# Altium PCB controller.PcbDoc
Units mil, origin at the board's own origin, x right, y up, seen from the top; angles counter-clockwise.
Board outline 6000 x 4000 mil, 2 copper layers (Top Layer, Bottom Layer); 7 components, 12 nets, 60 pads, 0 vias.
Unrouted connection lines stored in the file: 26.
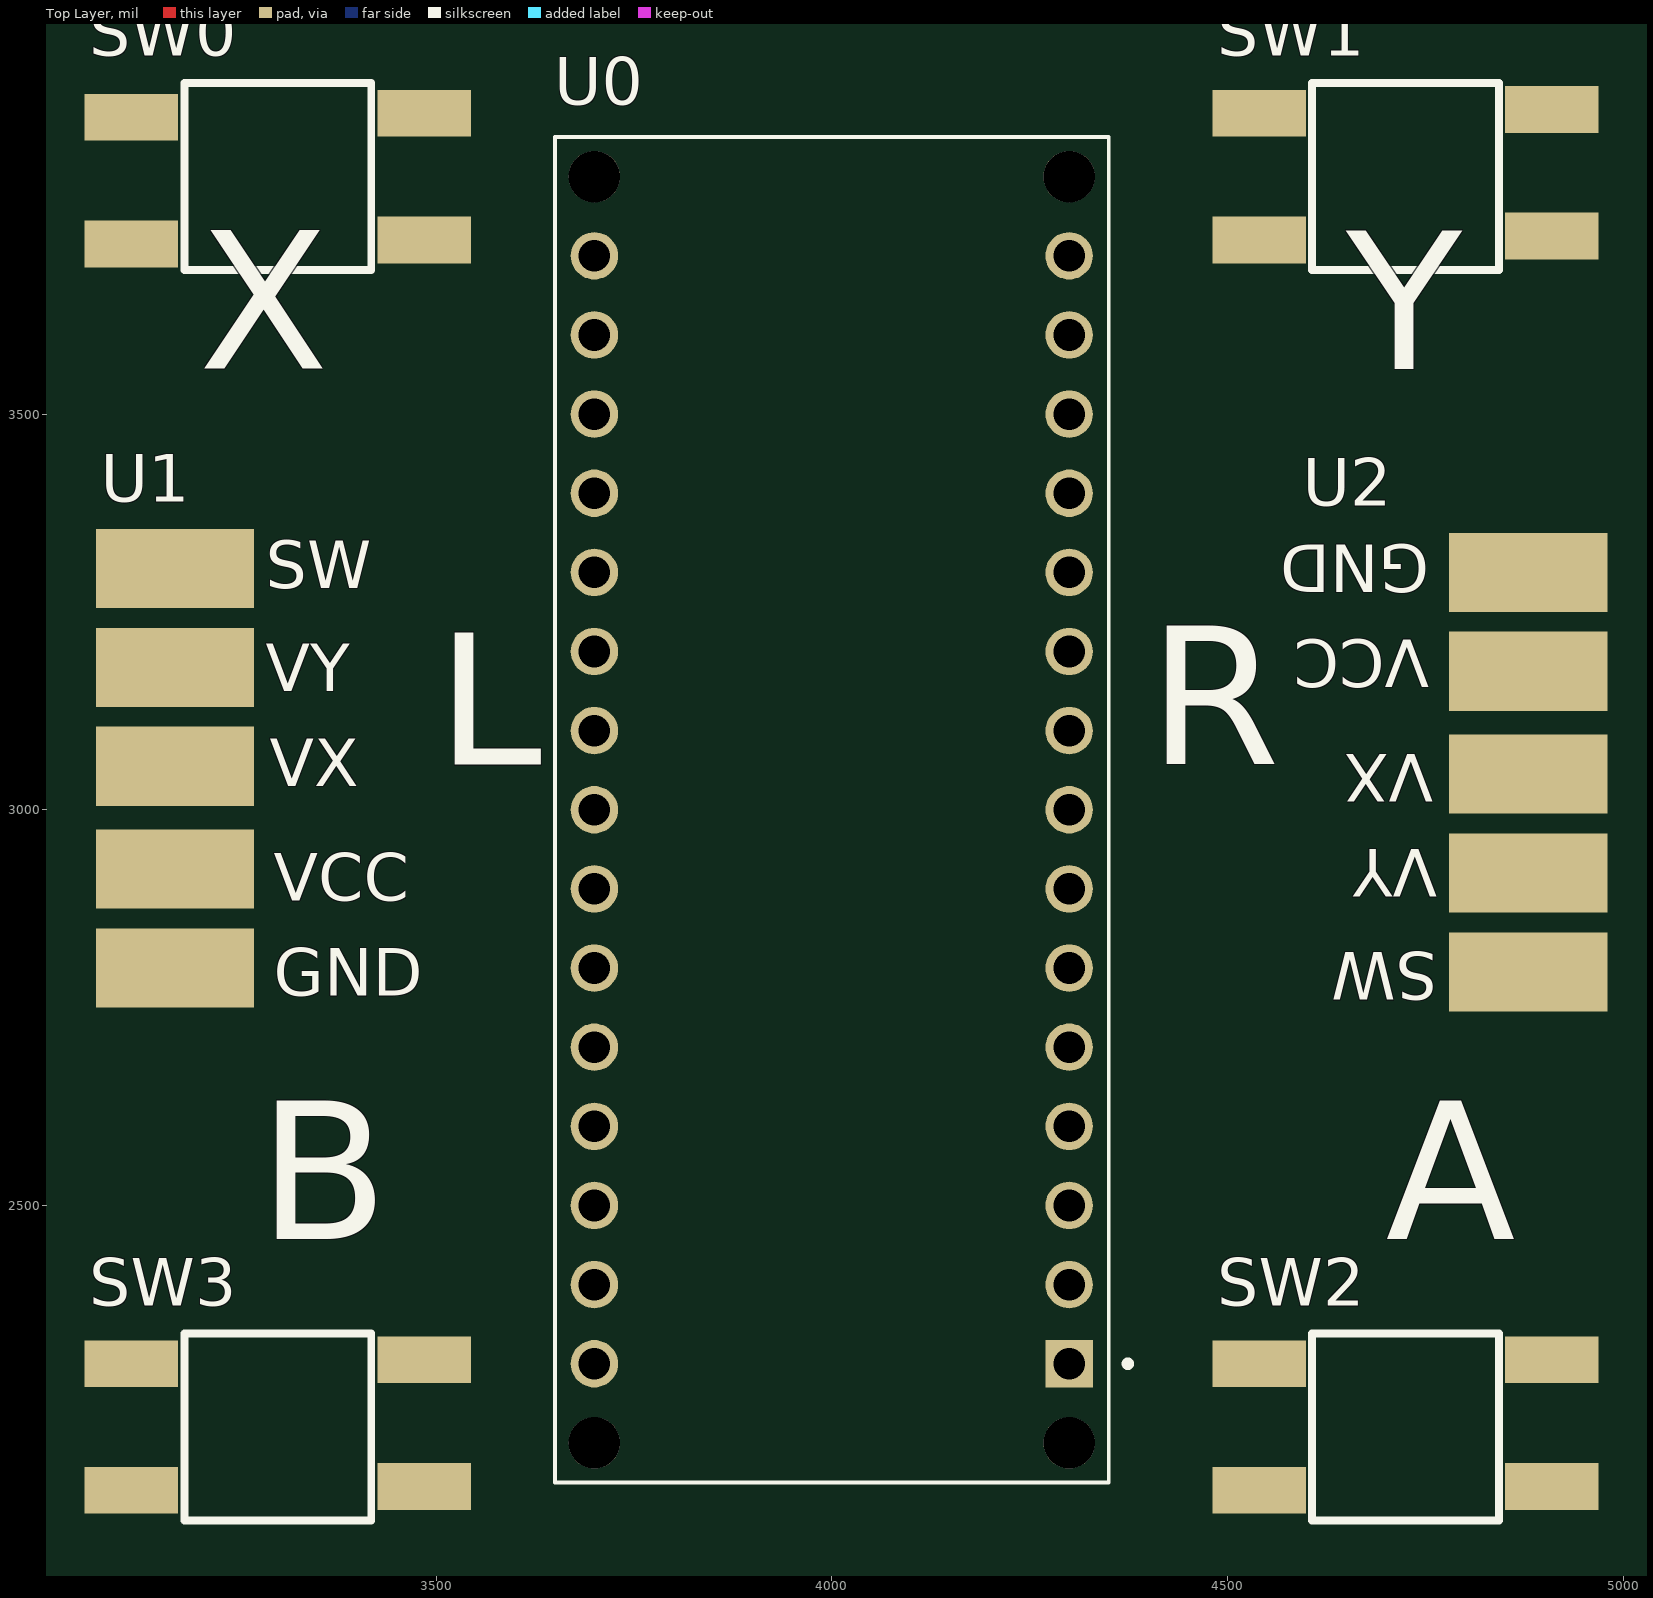
[diagram p0: Top Layer view]
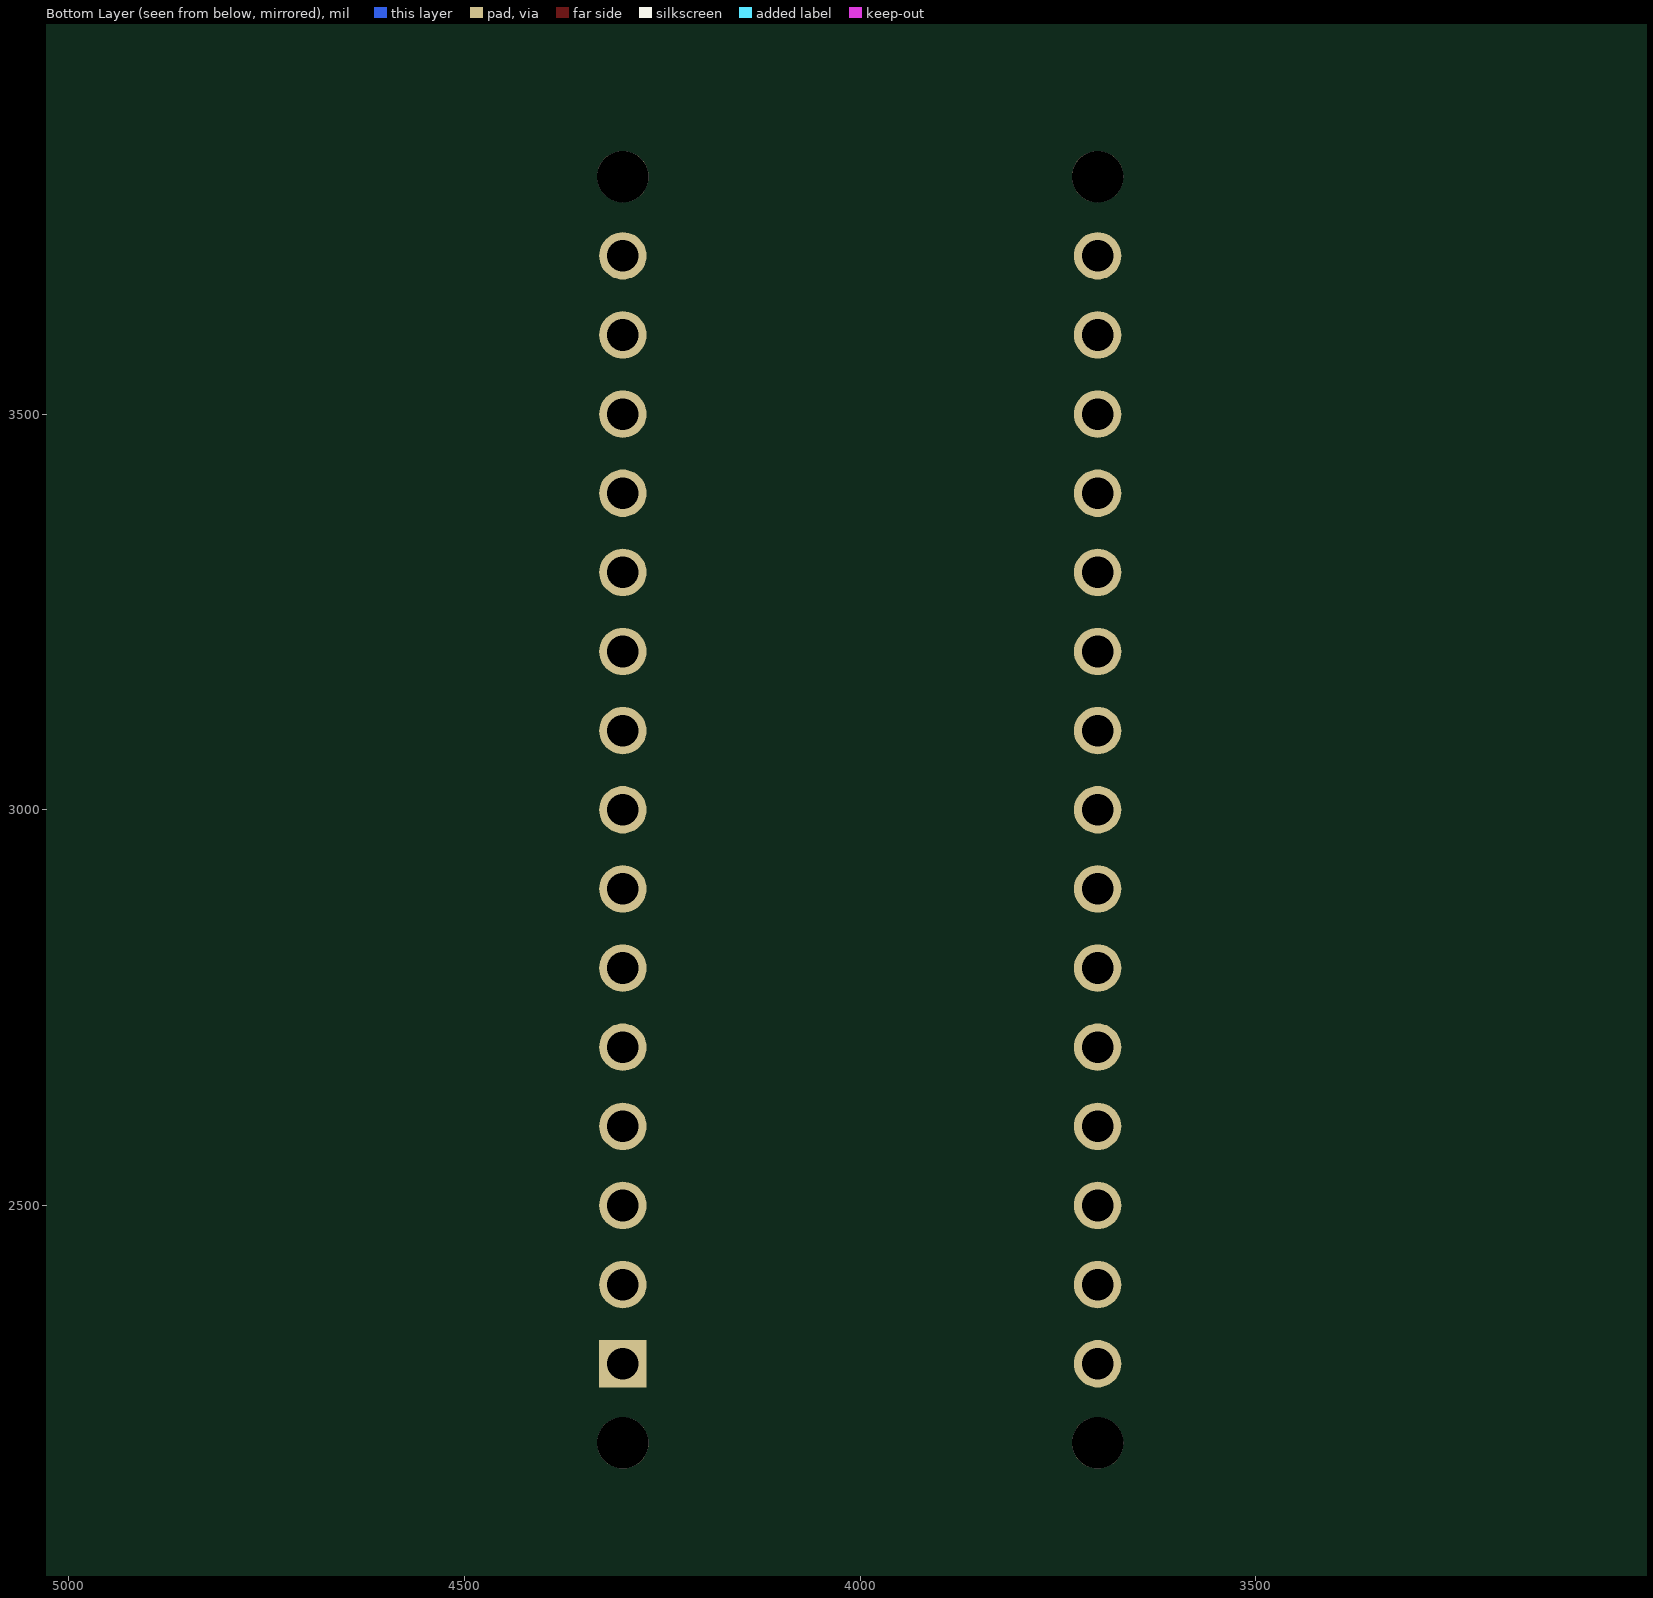
[diagram p1: Bottom Layer view, seen from below]

## Layer stack, top to bottom
Top Solder: solder mask 0.4, Solder Resist, Dk 3.5
Top Layer: signal copper 1.4
Dielectric 1: dielectric 12.6, FR-4, Dk 4.8
Bottom Layer: signal copper 1.4
Bottom Solder: solder mask 0.4, Solder Resist, Dk 3.5

## Board outline
1000,1000 7000,1000 7000,5000 1000,5000

## Design rules (kind name [scope] priority, off if disabled: settings)
Clearance [All] p1: gap=10 ignorepadtopadclearanceinfootprint=FALSE
PolygonConnect [All] p1: connectstyle=Relief reliefconductorwidth=10 reliefentries=4 polygonreliefangle="90 Angle" airgapwidth=10
RoutingVias [All] p1: holewidth=28 width=50 viastyle="Through Hole" minholewidth=28 minwidth=50 maxholewidth=28 maxwidth=50
SolderMaskExpansion [All] p1: expansion=4 istentingtop=FALSE
Width [All] p1: maxlimit=10 minlimit=10 preferedwidth=10
30 further rules are at their usual default settings.

## Components (designator, comment, footprint, x,y, rotation, side; value= is the part's Value field where it differs from the comment)
SW0 "" "temp switch" 3300,3800 r270 top
SW1 "" "temp switch" 4725,3800 r90 top
SW2 "" "temp switch" 4725,2220 r90 top
SW3 "" "temp switch" 3300,2220 r90 top
U0 "ABX00028" MODULE_ABX00028 4000,3000 r90 top
U1 "joystick" joystick#1 2400,3100 r90 top
U2 "joystick" joystick#2 5650,3000 r270 top

## Footprints (in the part's own frame and the unit in brackets; to place one, negate y for a bottom-side part, rotate by r counter-clockwise, add the part's x,y. Pads: shape width x height; smd on the part's side, far side on the other; paste and mask are expansions set on the pad)
joystick#1 [mil]
  rect 100x200 smd: 2(-175,-770) 3(-45,-770) 4(80,-770) 5(205,-770) " "(-300,-770)
joystick#2 [mil]
  rect 100x200 smd: 1(-300,-770) 2(-175,-770) 3(-45,-770) 4(80,-770) 5(205,-770)
MODULE_ABX00028 [mil]
  rect 60x60 / inner round 60 / far side rect 60x60 hole 40: 1(-700,-300)
  round 60 hole 40: 2(-600,-300) 3(-500,-300) 4(-400,-300) 5(-300,-300) 6(-200,-300) 7(-100,-300) 8(0,-300) 9(100,-300) 10(200,-300) 11(300,-300) 12(400,-300) 13(500,-300) 14(600,-300) 15(700,-300) 16(700,300) 17(600,300) 18(500,300) 19(400,300) 20(300,300) 21(200,300) 22(100,300) 23(0,300) 24(-100,300) 25(-200,300) 26(-300,300) 27(-400,300) 28(-500,300) 29(-600,300) 30(-700,300)
  round 65 hole 65 unplated: ""(-800,-300) ""(-800,300) ""(800,-300) ""(800,300)
  silkscreen extent -850,-378 850,350, body extent -895,-350 850,350, height 236
"temp switch" [mm]
  rect 1.5x3 smd: 1(-2.032,4.699) 1(-1.905,-4.699) 2(2.032,4.699) 2(2.159,-4.699)
  silkscreen extent -3,-3 3,3

## Part data
SW0 SW1 SW2 SW3: library part button
U0: "Arduinoâ€™s 5V compatible board in the smallest available form factor: 45x18mm!", Package=None, Availability="Not in stock", Check_prices=https://www.snapeda.com/parts/Arduino%20Nano%20Every/Arduino/view-part/?ref=eda, MF=Arduino, MP="Arduino Nano Every", Price=None, SnapEDA_Link=https://www.snapeda.com/parts/Arduino%20Nano%20Every/Arduino/view-part/?ref=snap

## Nets (pads, with @x,y where several pads share a name; then routed paths per layer and width w, separated by ;. In a path a pad name is that pad's centre, name@x,y a point inside that pad or via, vN(x,y) a via of type N, cw(c..) or ccw(c..) an arc to the next point about the centre after c; other vN are vias at no path point)
NetSW0_1: "U1. " SW0.1 SW1.1 SW2.2 SW3.2 U0.19 U2.1
NetSW2_1: SW2.1 U0.29
NetSW3_1: SW3.1 U0.30
NetU0_6: U0.6 U1.5
NetU0_7: U0.7 U2.5
NetU0_8: U0.8 U1.4
NetU0_9: U0.9 U1.3
NetU0_10: U0.10 U2.4
NetU0_11: U0.11 U2.3
NetU0_12: U0.12 U1.2 U2.2
SW0: SW0.2 U0.4
SW1: SW1.2 U0.5
pads on no net: U0. U0.1 U0.2 U0.3 U0.13 U0.14 U0.15 U0.16 U0.17 U0.18 U0.20 U0.21 U0.22 U0.23 U0.24 U0.25 U0.26 U0.27 U0.28

## Silkscreen, mask and mechanical layers (free items; w line width, h text height)
Top Overlay:
  text "X" at 3200,3500 h300
  text "Y" at 4650,3500 h300
  text "L" at 3500,3000 h300
  text "R" at 4400.07,3000 h300
  text "B" at 3275,2400 h300
  text "A" at 4700,2400 h300
Mechanical 15:
  rectangle: 3010,2020 5010,4020

## Text inside footprints (layer, text, board x,y; h text height)
U1: Top Overlay "GND" at 3295,2765 h60; Top Overlay "VCC" at 3295,2885 h60; Top Overlay "VX" at 3290,3030 h60; Top Overlay "VY" at 3285,3150 h60; Top Overlay "SW" at 3285,3280 h60
U2: Top Overlay "GND" at 4755,3335 h60 r180; Top Overlay "VCC" at 4755,3215 h60 r180; Top Overlay "VX" at 4760,3070 h60 r180; Top Overlay "VY" at 4765,2950 h60 r180; Top Overlay "SW" at 4765,2820 h60 r180